# Altium PCB PCBnutNhan.PcbDoc
Units mil, origin at the board's own origin, x right, y up, seen from the top; angles counter-clockwise.
Board outline 2024.03 x 2316.03 mil, 2 copper layers (Top Layer, Bottom Layer); 7 components, 11 nets, 59 pads, 0 vias.
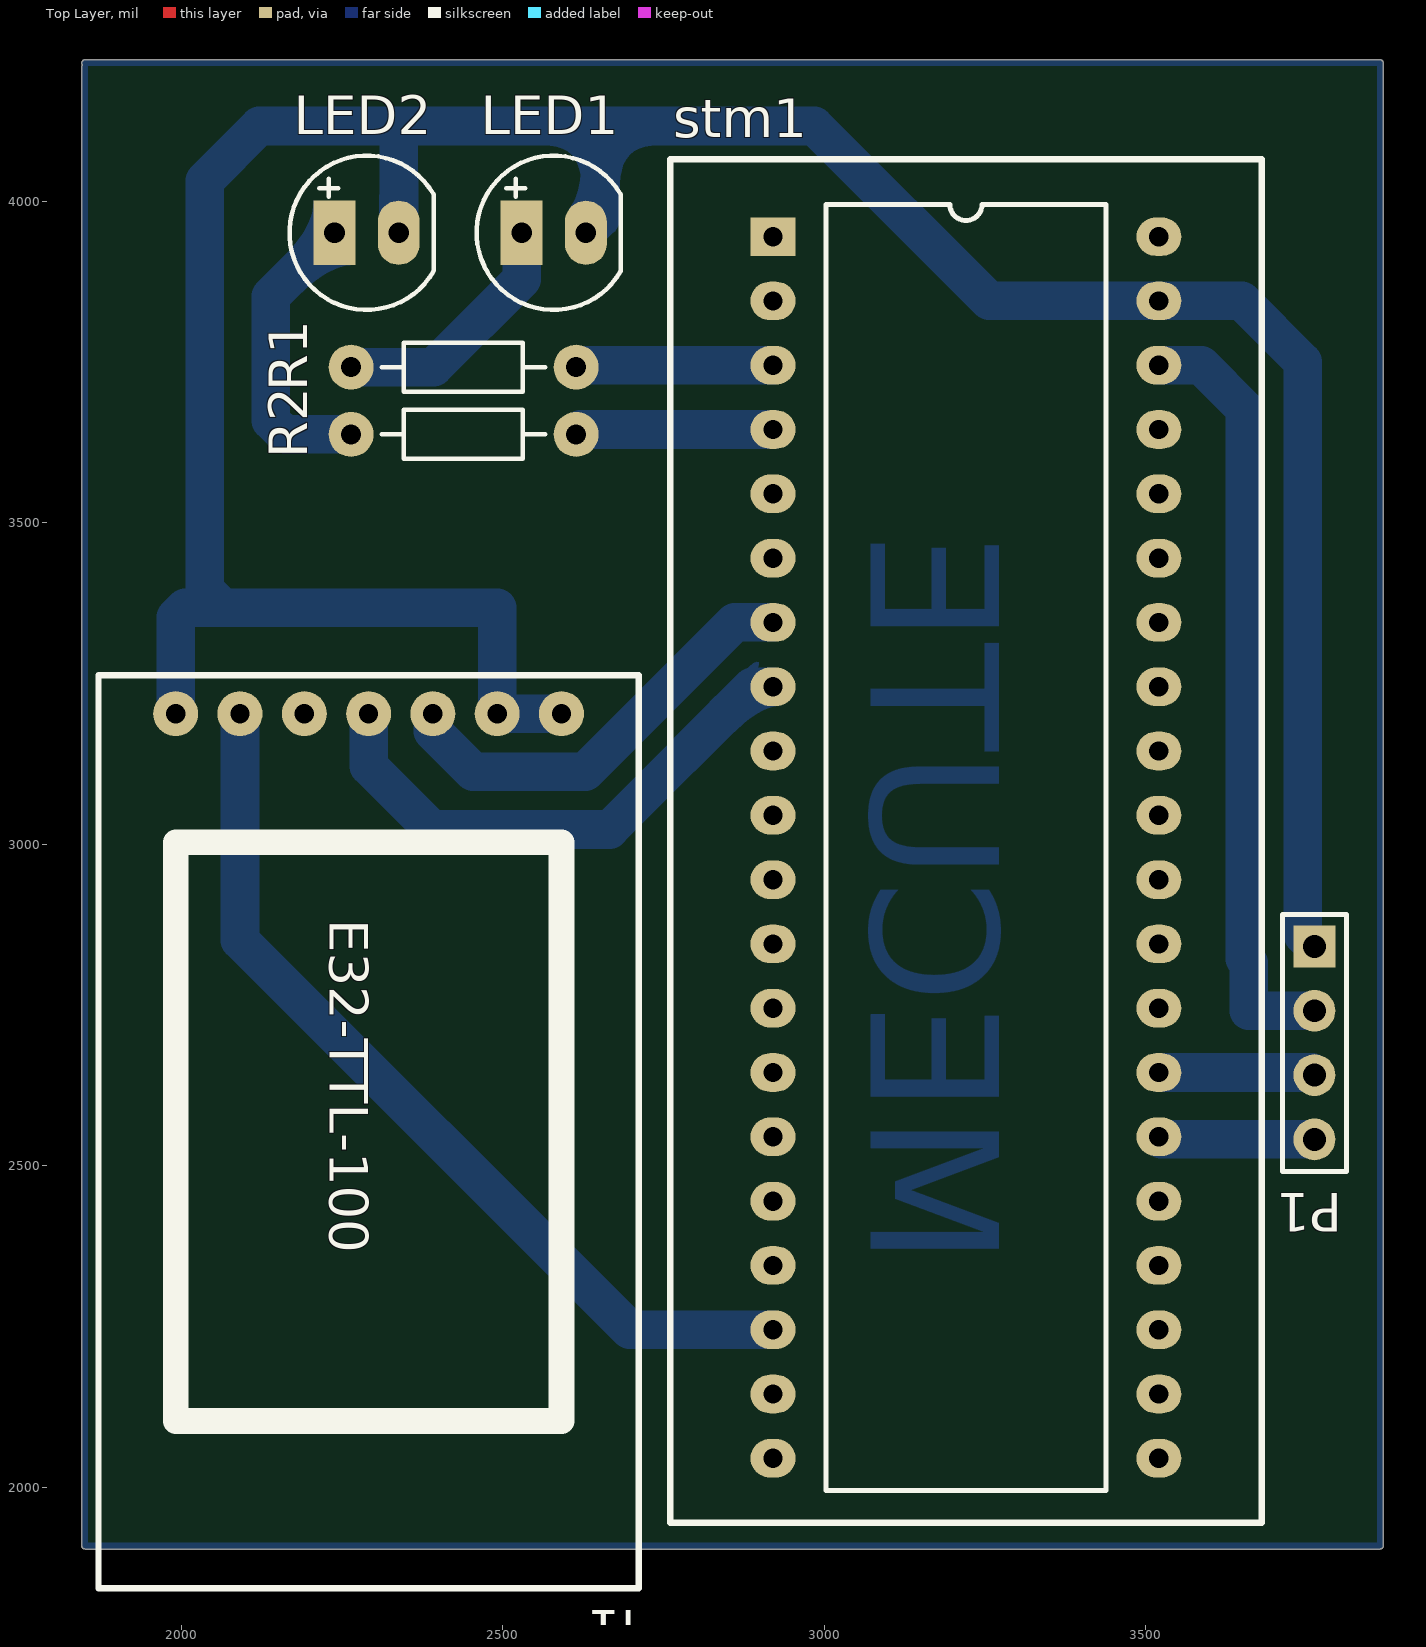
[diagram p0: Top Layer view]
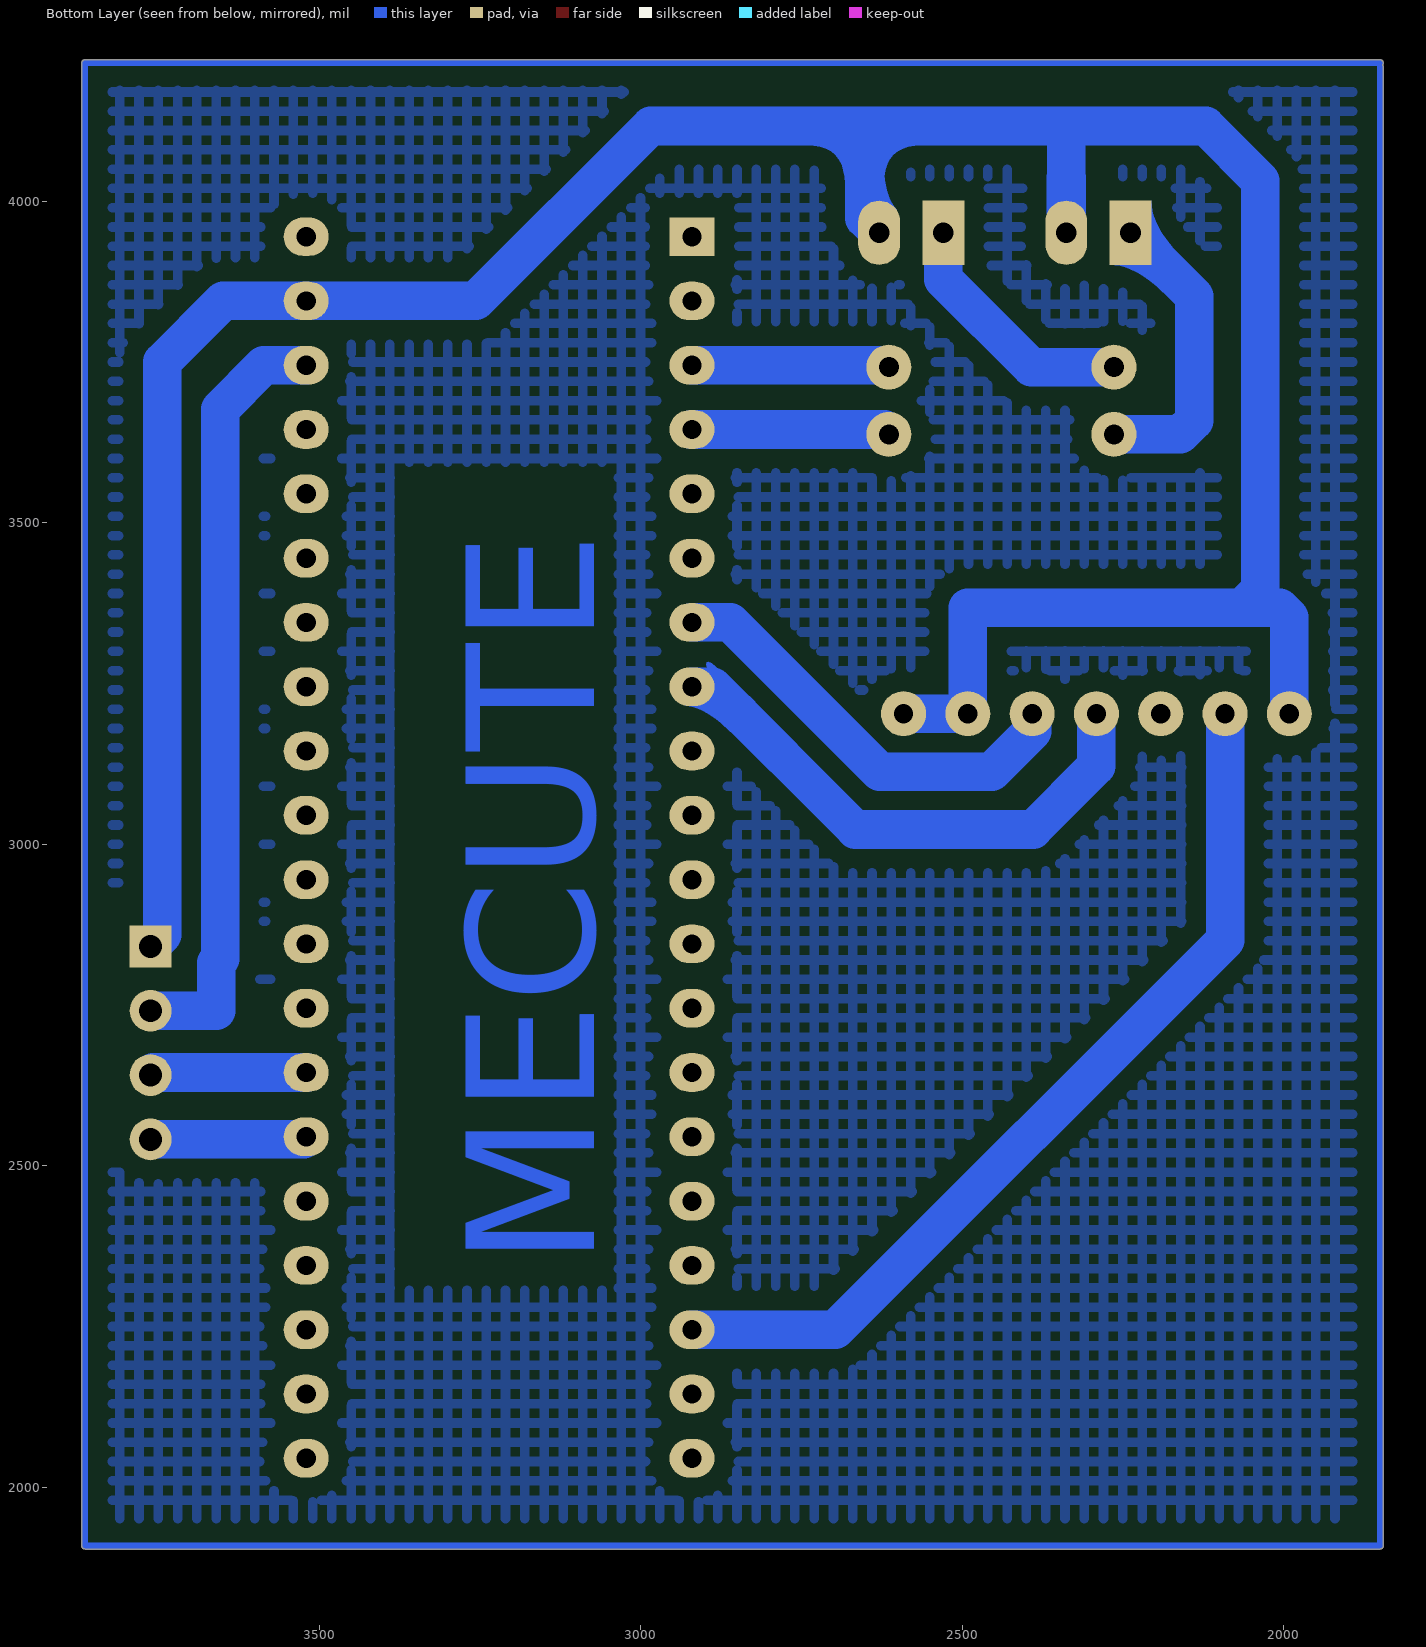
[diagram p1: Bottom Layer view, seen from below]
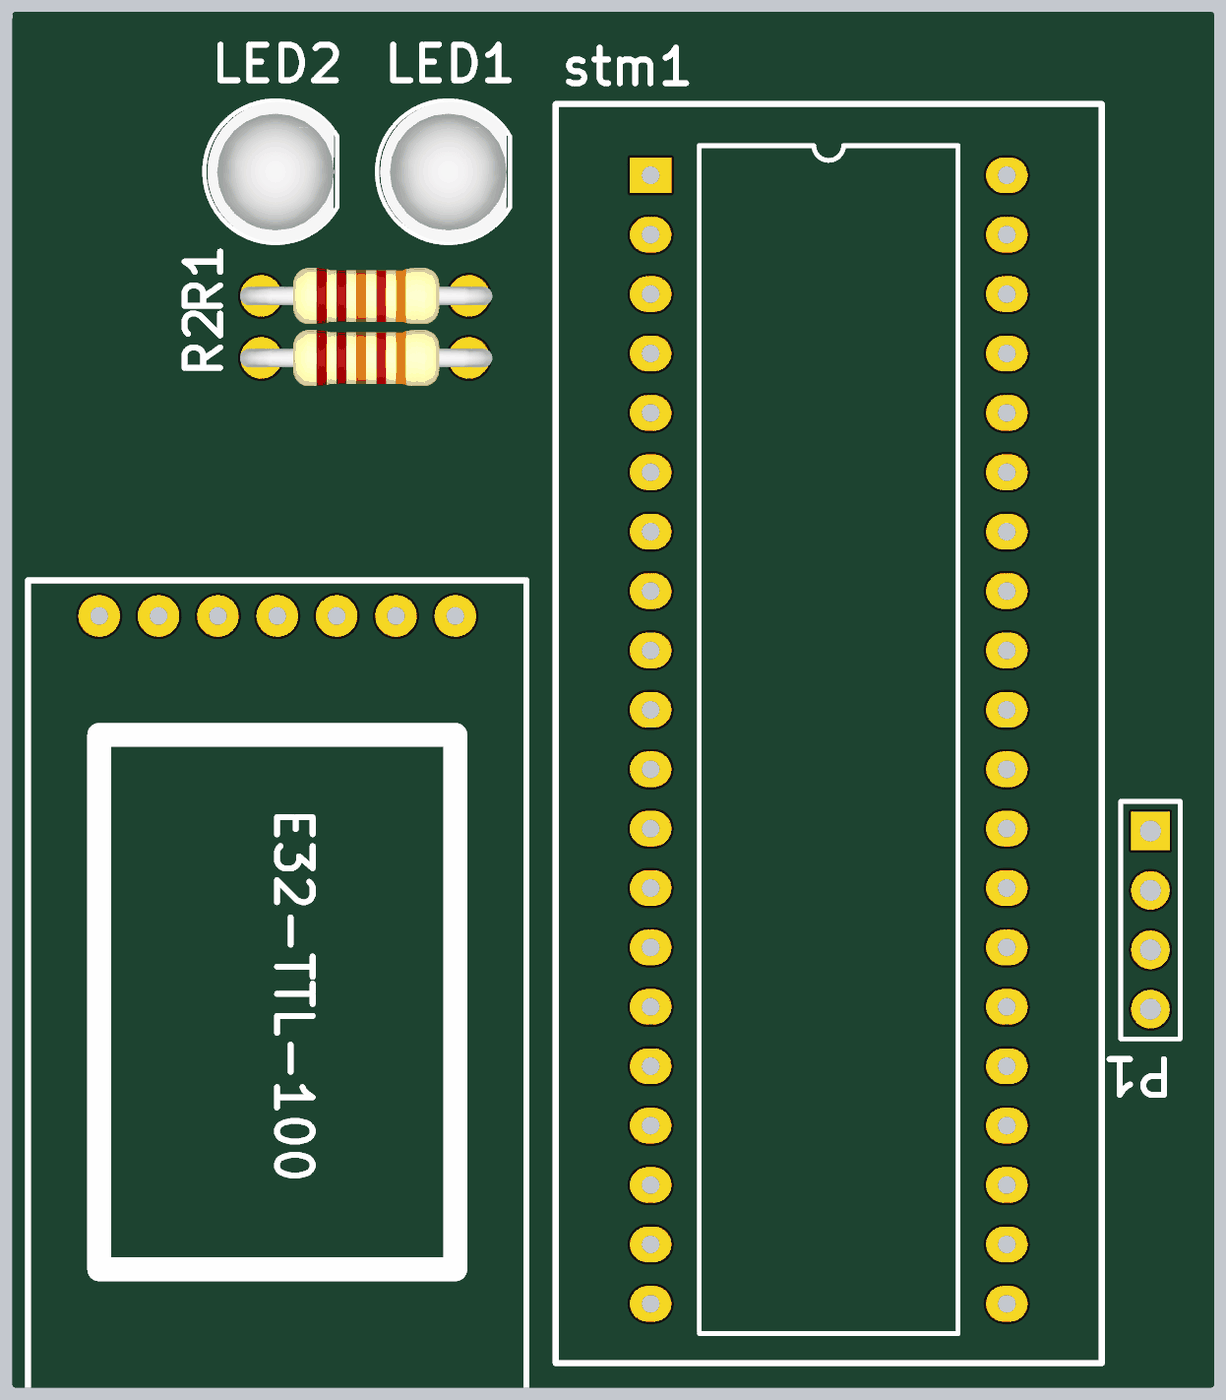
[diagram p2: 3D render of the assembled board from above, using the file's embedded part models]

## Layer stack, top to bottom
Top Solder: solder mask 0.4, Solder Resist, Dk 3.5
Top Layer: signal copper 1.4
Dielectric 1: dielectric 12.6, FR-4, Dk 4.8
Bottom Layer: signal copper 1.4
Bottom Solder: solder mask 0.4, Solder Resist, Dk 3.5

## Board outline
1844.98,1909 1844.98,4209 cw(c1850,4209) 1845.98,4212 cw(c1850,4215) 1850,4220.02 3864,4220.02 cw(c3864,4215) 3869.01,4215 3869.01,1909 cw(c3864,1909) 3864,1903.98 1850,1903.98 cw(c1850,1909)

## Design rules (kind name [scope] priority, off if disabled: settings)
Clearance [All] p1: gap=30
PolygonConnect [All] p1: connectstyle=Relief reliefconductorwidth=10 reliefentries=4 polygonreliefangle="90 Angle" airgapwidth=10
RoutingVias [All] p1: holewidth=28 width=50 viastyle="Through Hole" minholewidth=28 minwidth=50 maxholewidth=28 maxwidth=50
SolderMaskExpansion [All] p1: expansion=4
Width [All] p1: maxlimit=80 minlimit=20 preferedwidth=60
30 further rules are at their usual default settings.

## Components (designator, comment, footprint, x,y, rotation, side; value= is the part's Value field where it differs from the comment)
l1 "lora" "lora sx1278" 2591,3303 r270 top
LED1 "LED" LED-5-RED 2529,3951 r0 top
LED2 "LED" LED-5-RED 2238,3951 r0 top
P1 "Header 4" HDR1X4 3762,2841 r270 top
R1 "100" R1/4W 2613.8,3742 r180 top
R2 "100" R1/4W 2613.8,3637.5 r180 top
stm1 "stm32f103c8t6" 40chan 2920.01,3945 r0 top

## Footprints (in the part's own frame and the unit in brackets; to place one, negate y for a bottom-side part, rotate by r counter-clockwise, add the part's x,y. Pads: shape width x height; smd on the part's side, far side on the other; paste and mask are expansions set on the pad)
40chan [mil] "board 40 chan"
  rect 70x60 hole 30: 1(0,0)
  oval 70x60 hole 30: 2(0,-100) 3(0,-200) 4(0,-300) 5(0,-400) 6(0,-500) 7(0,-600) 8(0,-700) 9(0,-800) 10(0,-900) 11(0,-1000) 12(0,-1100) 13(0,-1200) 14(0,-1300) 15(0,-1400) 16(0,-1500) 17(0,-1600) 18(0,-1700) 19(0,-1800) 20(0,-1900) 21(600,-1900) 22(600,-1800) 23(600,-1700) 24(600,-1600) 25(600,-1500) 26(600,-1400) 27(600,-1300) 28(600,-1200) 29(600,-1100) 30(600,-1000) 31(600,-900) 32(600,-800) 33(600,-700) 34(600,-600) 35(600,-500) 36(600,-400) 37(600,-300) 38(600,-200) 39(600,-100) 40(600,0)
  silkscreen extent -160,-2000 760,120, body extent -160,-2000 760,120, height 150
HDR1X4 [mil] "Connector; Header; 4 Position"
  rect 65x65 hole 35.43: 1(0,0)
  round 65 hole 35.43: 2(100,0) 3(200,0) 4(300,0)
  silkscreen extent -50,-50 350,50, body extent -50,-50 350,50, height 276
LED-5-RED [mil] "LED 2 PIN, 5 ly , Only colour,pin to pin 100mil"
  rect 65x100 hole 32: 1(0,0)
  oval 65x100 hole 32: 2(100,0)
  silkscreen extent -70,-120 154,120, body extent -65,-119 149,118, height 339
"lora sx1278" [mil]
  round 70 hole 30: 1(100,0) 2(100,-100) 3(100,-200) 4(100,-300) 5(100,-400) 6(100,-500) 7(100,-600)
  silkscreen extent 40,-720 1460,120
R1/4W [mil] "R 1/4W, 2 Pin, 350mil"
  round 70 hole 31: 1(0,0) 2(350,0)
  silkscreen extent 48,-38 302,38, body extent -40,-47 386,47, height 111

## Part data
l1: library part "lora SX1278"
LED1 LED2: "LED Single colour Green and Red"
P1: "Header, 4-Pin"
R1 R2: library part R1/4W, "Resistor 1/4W"

## Nets (pads, with @x,y where several pads share a name; then routed paths per layer and width w, separated by ;. In a path a pad name is that pad's centre, name@x,y a point inside that pad or via, vN(x,y) a via of type N, cw(c..) or ccw(c..) an arc to the next point about the centre after c; other vN are vias at no path point)
3V3: l1.6 stm1.18 | length 1432
  Bottom Layer w60: l1.6 2091,2851 2697,2245 stm1.18
C14: R1.1 stm1.3 | length 303.2
  Bottom Layer w60: R1.1@2616.8,3745 stm1.3
C15: R2.1 stm1.4 | length 298.7
  Bottom Layer w60: R2.1@2621.3,3645 stm1.4
GND: l1.1 l1.2 l1.7 LED1.2 LED2.2 P1.1 stm1.39 | length 4778.7
  Bottom Layer w60: l1.7 1991,3353 2006,3368 2091,3368 ; LED2.2 2338,4113 2342,4117 ; l1.1 l1.2 2491,3368 2091,3368 ; LED1.2 2652,3974 2652,4117 ; P1.1 3744,2859 3744,3750 3649,3845 stm1.39 3256,3845 2984,4117 2652,4117 ; 2091,3368 2064,3368 2036,3396 2036,4032 2121,4117 2652,4117
Netl1_3: l1.3 stm1.7 | length 678.4
  Bottom Layer w60: l1.3 2391,3175.72 2453.72,3113 2628.28,3113 2860.28,3345 stm1.7
Netl1_4: l1.4 stm1.8 | length 843.1
  Bottom Layer w60: l1.4 2291,3121.72 2389.72,3023 2665.73,3023 2887.73,3245 stm1.8
NetLED1_1: LED1.1 R1.2 | length 393.9
  Bottom Layer w60: R1.2 2392,3742 2529,3879 LED1.1
NetLED2_1: LED2.1 R2.2 | length 466.7
  Bottom Layer w60: LED2.1 2139,3852 2139,3659 2160.5,3637.5 R2.2
NetP1_2: P1.2 stm1.38 | length 1202.5
  Bottom Layer w60: stm1.38 3585.72,3745 3654,3676.72 3654,2821.72 3660,2815.72 3660,2741 P1.2
NetP1_3: P1.3 stm1.27 | length 238
  Bottom Layer w60: stm1.27 P1.3@3758,2645
NetP1_4: P1.4 stm1.26 | length 238
  Bottom Layer w60: stm1.26@3524.01,2541 P1.4
pads on no net: l1.5 stm1.1 stm1.2 stm1.5 stm1.6 stm1.9 stm1.10 stm1.11 stm1.12 stm1.13 stm1.14 stm1.15 stm1.16 stm1.17 stm1.19 stm1.20 stm1.21 stm1.22 stm1.23 stm1.24 stm1.25 stm1.28 stm1.29 stm1.30 stm1.31 stm1.32 stm1.33 stm1.34 stm1.35 stm1.36 stm1.37 stm1.40
copper on no net: | length 8634
  Bottom Layer w10: 1850,4209 1850,1909 3864,1909 3864,4215 1850,4215

## Polygon pours and split planes (outlines as drawn)
no net on Bottom Layer "Bottom Layer-No Net" (hatched 90Degree grid 30 track 15, pour order 2): 1850,4209 3858,4209 3864,4215 3864,1909 1850,1909 1850,4215

## Other copper
Bottom Layer:
  text "MECUTE" at 3072,2344 h200 r270

## Text inside footprints (layer, text, board x,y; h text height)
l1: Top Overlay "E32-TTL-100" at 2231,2883 h60 r270